# EAGLE board one_axis_JStep (EAGLE 6.3)
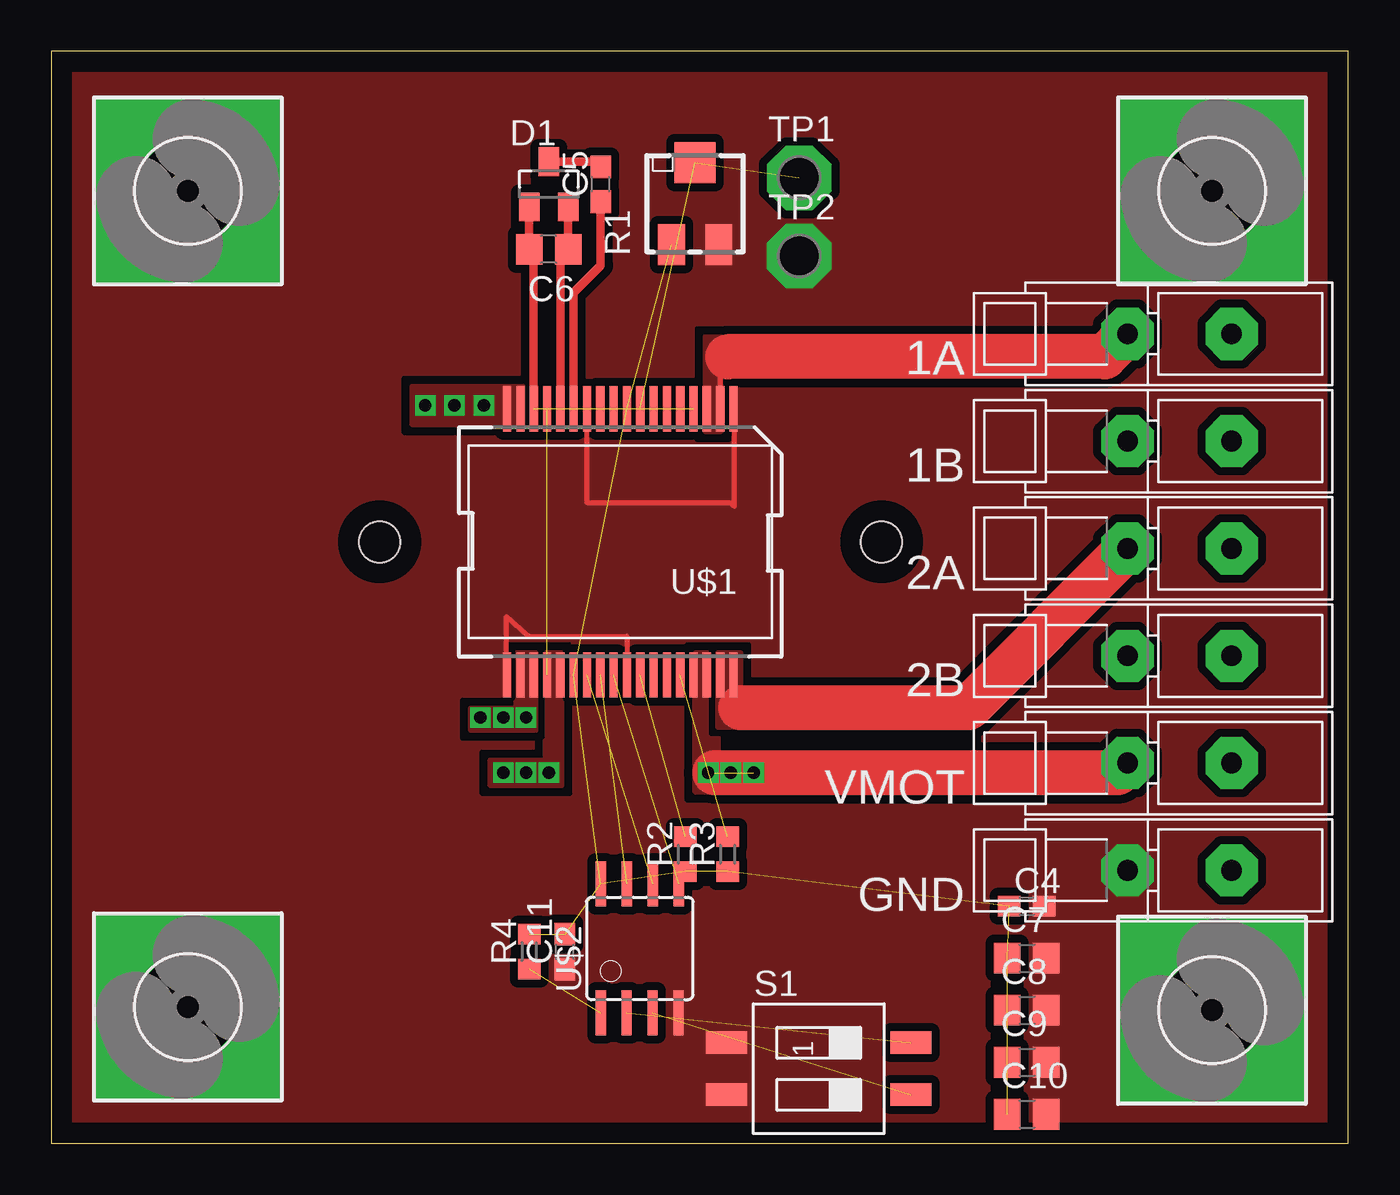
[diagram p0: board, top side]
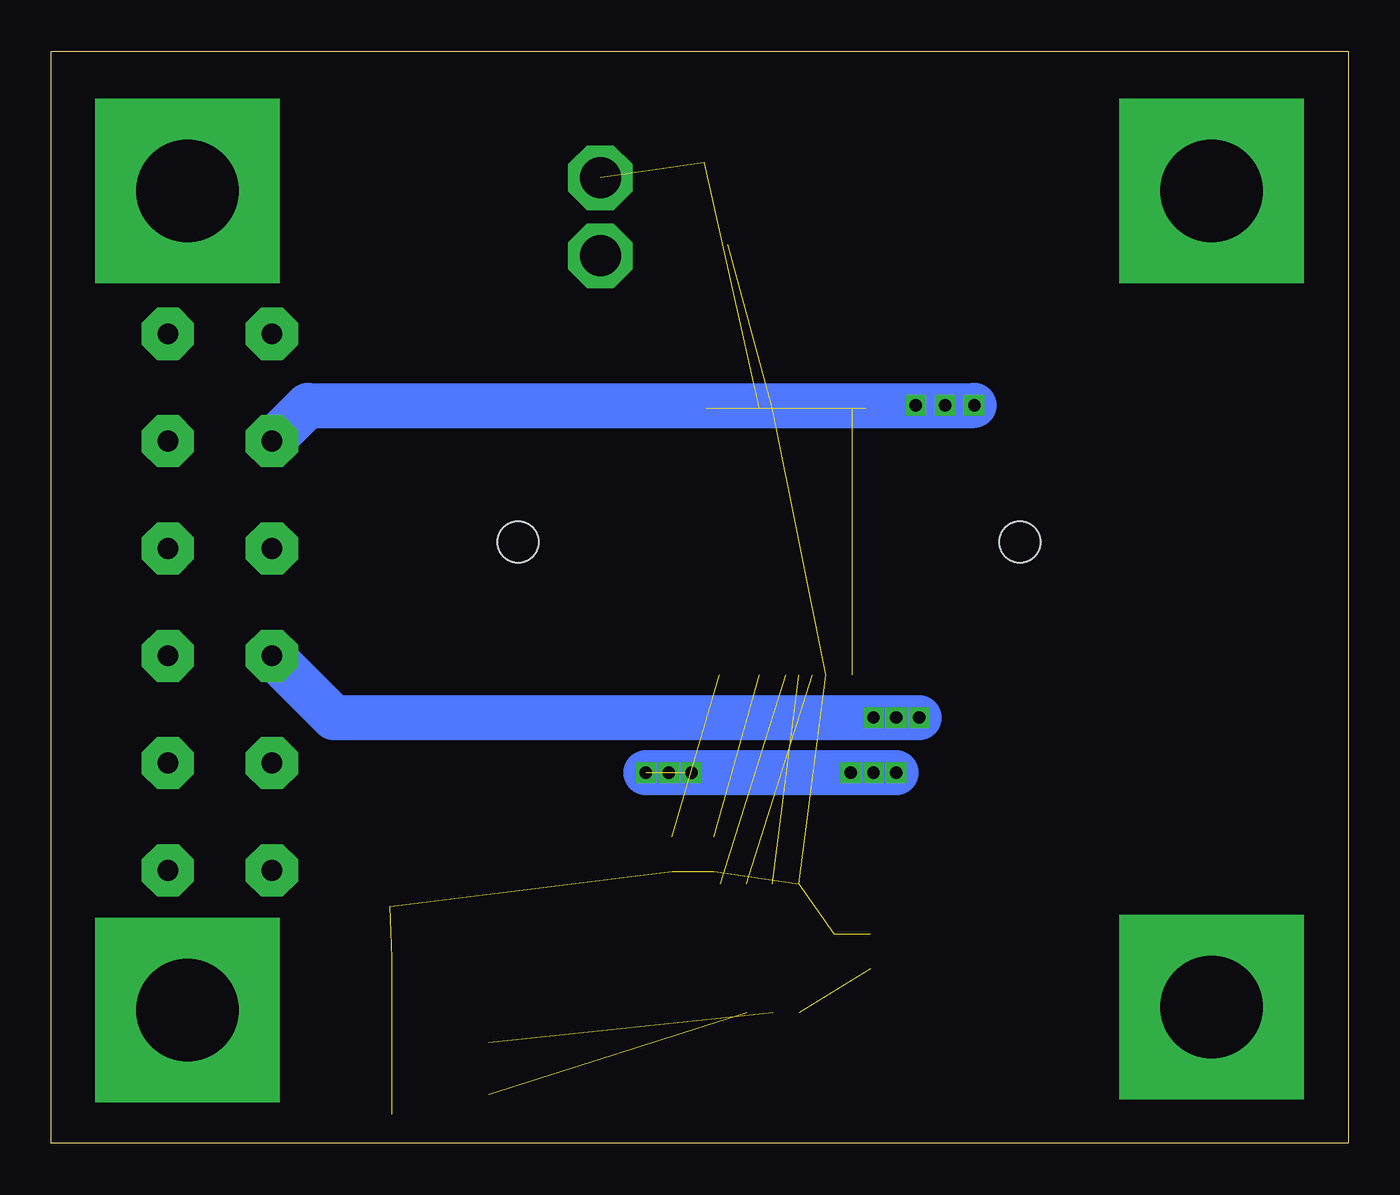
[diagram p1: board, bottom side, seen from below]

Size 63.32 x 53.33 mm. Coordinates in mm from the lower left corner, seen from the top.
Outline: 0,0 63.32,0 63.32,53.33 0,53.33 0,0
Copper layers (1*16): Top 0.035mm / dielectric 1.5mm / Bottom 0.035mm
Design rules "default *": minimum track width 10mil, minimum drill 24mil, track to track 8mil, track to pad 8mil, pad to pad 8mil, via to via 8mil, smd to smd 0mil, copper to edge 40mil, drill to drill 8mil, minimum pad ring 15mil, minimum via ring 8mil, stop-mask expansion 4mil, vias tented up to drill 0mil, thermal gap 10mil
Holes 2 mm at 16.03,29.37 40.53,29.37

## Footprints (pad centres in the part's own frame; a part is rotated, then mirrored left to right if it is on the bottom)
WAGO256 = drill 1.016 pad 2.54 octagon: 1 0,0; A1 -5.08,0
C0603 = smd 1.1 x 1: 1 -0.85,0; 2 0.85,0
C0805 = smd 1.3 x 1.5: 1 -0.95,0; 2 0.95,0
SOT23 = smd 1 x 1.4: 1 -0.95,-1.1; 2 0.95,-1.1; 3 0,1.1
5,0-PAD-SQUARE = drill 5 pad 9 square: B5 0,0
RTRIM5X = smd 1.3 x 2: 1 -1.15,-2; 3 1.15,-2 | smd 2 x 2: 2 0,2
R0603 = smd 1 x 1.1: 1 -0.85,0; 2 0.85,0
SMS-002 = smd 1.092 x 2.007: 1 -1.27,-4.496; 2 1.27,-4.496; 3 1.27,4.496; 4 -1.27,4.496
P1-20 = drill 2.007 pad 3.15 octagon: TP 0,0
POWERSO-36 = smd 0.4 x 2.2: 1 -5.525,-6.5; 2 -4.875,-6.5; 3 -4.225,-6.5; 4 -3.575,-6.5; 5 -2.925,-6.5; 6 -2.275,-6.5; 7 -1.625,-6.5; 8 -0.975,-6.5; 9 -0.325,-6.5; 10 0.325,-6.5; 11 0.975,-6.5; 12 1.625,-6.5; 13 2.275,-6.5; 14 2.925,-6.5; 15 3.575,-6.5; 16 4.225,-6.5; 17 4.875,-6.5; 18 5.525,-6.5; 19 5.525,6.5; 20 4.875,6.5; 21 4.225,6.5; 22 3.575,6.5; 23 2.925,6.5; 24 2.275,6.5; 25 1.625,6.5; 26 0.975,6.5; 27 0.325,6.5; 28 -0.325,6.5; 29 -0.975,6.5; 30 -1.625,6.5; 31 -2.275,6.5; 32 -2.925,6.5; 33 -3.575,6.5; 34 -4.225,6.5; 35 -4.875,6.5; 36 -5.525,6.5
SOIC8 = smd 0.5 x 2.2: 1 -1.905,-3.154; 2 -0.645,-3.154; 3 0.625,-3.154; 4 1.895,-3.154; 5 1.905,3.154; 6 0.635,3.154; 7 -0.635,3.154; 8 -1.905,3.154

## Placement (x,y rotation side)
1A  WAGO256  [WAGO256]  52.55,39.53 180 top
1B  WAGO256  [WAGO256]  52.55,34.29 180 top
2A  WAGO256  [WAGO256]  52.55,29.05 180 top
2B  WAGO256  [WAGO256]  52.55,23.81 180 top
C4  100n  [C0603]  47.62,11.59 0 top
C5  10n  [C0603]  26.83,46.83 90 top
C6  220n  [C0805]  24.29,43.66 180 top
C7  10u  [C0805]  47.62,9.05 0 top
C8  10u  [C0805]  47.62,6.51 0 top
C9  10u  [C0805]  47.62,3.97 0 top
C10  10u  [C0805]  47.62,1.43 0 top
C11  100n  [C0603]  25.08,9.37 90 top
D1  BAV99  [SOT23]  24.29,46.83 0 top
GND  WAGO256  [WAGO256]  52.55,13.34 180 top
H1  MOUNT-PAD-SQUARE5.0  [5,0-PAD-SQUARE]  6.67,6.67 0 top
H2  MOUNT-PAD-SQUARE5.0  [5,0-PAD-SQUARE]  6.67,46.51 0 top
H3  MOUNT-PAD-SQUARE5.0  [5,0-PAD-SQUARE]  56.67,46.51 0 top
H4  MOUNT-PAD-SQUARE5.0  [5,0-PAD-SQUARE]  56.67,6.51 0 top
R1  TS53YLK010  [RTRIM5X]  31.43,45.88 0 top
R2  39K  [R0603]  30.96,14.13 90 top
R3  39K  [R0603]  33.02,14.13 90 top
R4  10K  [R0603]  23.34,9.37 90 top
S1  SWS002  [SMS-002]  37.47,3.65 270 top
TP1  TPSPAD1-20  [P1-20]  36.51,47.15 0 top
TP2  TPSPAD1-20  [P1-20]  36.51,43.34 0 top
U$1  L6470  [POWERSO-36]  27.78,29.37 180 top
U$2  TINY25-20SU  [SOIC8]  28.73,9.53 0 top
VMOT  WAGO256  [WAGO256]  52.55,18.57 180 top

## Library data of the parts
1A 1B 2A 2B GND VMOT = #PaJa_konektory
C4-C11 R2-R4 = rcl
D1 = diode
H1-H4 = holes
R1 = resistor
S1 = smd-special
TP1 TP2 = testpad
U$1 = st-microelectronics
U$2 = avr-5

## Nets
CLK: U$1.26 U$2.7
CS: U$1.30
GND: C4.2 C7.2 C8.2 C9.2 C10.2 C11.1 GND.1 H1.B5 H2.B5 H3.B5 H4.B5 R1.3 S1.1 S1.2 TP2.TP U$1.1 U$1.12 U$1.19 U$1.28 U$2.4
MISO: U$1.25 U$2.6
MOSI: U$1.27 U$2.5
N$1: R1.2 TP1.TP U$1.8
N$3: R2.2 U$1.29
N$4: R3.2 U$1.32
N$8: C5.1 U$1.13
N$9: C5.2 D1.3
N$10: C6.1 D1.2 U$1.14
N$13: 1A.1 U$1.2 U$1.3
N$14: 1B.1 U$1.17 U$1.18
N$15: 2A.1 U$1.35 U$1.36
N$16: 2B.1 U$1.20 U$1.21
N$17: S1.4 U$2.2
N$18: S1.3 U$2.3
RESET: R4.1 U$2.1
VDD: C4.1 C7.1 C8.1 C9.1 C10.1 C11.2 R1.1 R2.1 R3.1 R4.2 U$1.9 U$1.24 U$2.8
VMOT: C6.2 D1.1 U$1.4 U$1.5 U$1.15 U$1.16 U$1.22 U$1.23 U$1.33 U$1.34 VMOT.1

## Tracks (layer width: path | path; a pad name or v marks a point on that pad's centre or on a via)
CLK  (1 unrouted)
GND
  Top 0.254: U$1.1 33.34,35.84 33.34,31.11 33.18,31.27 26.19,31.27 26.16,31.31 U$1.12 | U$1.19 22.22,23 22.22,25.72 23.34,24.76 28.1,24.76 28.11,24.76 U$1.28
  Top 0.406: U$1.28
  pour Top (isolate 0.406, rank 6, no thermals): 0,53.34 63.34,53.34 63.34,0 0,0
MISO  (1 unrouted)
MOSI  (1 unrouted)
N$1  (2 unrouted)
N$3  (1 unrouted)
N$4  (1 unrouted)
N$8
  Top 0.406: U$1.13 25.51,41.54 26.83,42.86 C5.1
N$9
  Top 0.406: D1.3 26.74,47.93 C5.2
N$10
  Top 0.406: U$1.14 24.86,43.27 C6.1 D1.2
N$13
  Top 0.254: 33.02,38.42 32.66,38.37 U$1.2
  Top 2.184: 33.02,38.42 51.43,38.42 1A.1
  pour Top (isolate 0.254, no thermals): 31.91,39.37 31.91,34.77 32.7,34.77 32.7,39.37
N$14  (via drill 0.6)
  Bottom 2.184: v18.26,36.04 50.8,36.04 1B.1
  other vias: 21.11,36.04 19.69,36.04
  pour Top (rank 3, no thermals): 17.62,36.99 23.02,36.99 23.02,35.08 17.62,35.08
N$15
  Top 2.184: 33.66,21.27 44.77,21.27 2A.1
  pour Top (no thermals): 32.54,23.97 33.66,23.97 33.66,20.32 32.54,20.32
N$16  (via drill 0.6)
  Bottom 2.184: v20.95,20.8 49.53,20.8 2B.1
  other vias: 23.18,20.8 22.07,20.8
  pour Top (rank 3, no thermals): 22.7,23.97 23.65,23.97 23.65,20.16 20.48,20.16 20.48,21.27 22.7,21.27
N$17  (1 unrouted)
N$18  (1 unrouted)
RESET  (1 unrouted)
VDD  (12 unrouted)
VMOT  (via drill 0.6)  (6 unrouted)
  Top 0.406: U$1.16 23.56,43.44 C6.2 D1.1
  Top 2.184: VMOT.1 52.07,18.1 32.39,18.1
  Bottom 2.184: v22.07,18.1 v34.29,18.1
  other vias: 24.29,18.1 23.18,18.1 32.07,18.1 33.18,18.1
  pour Top (isolate 0.33, rank 4, no thermals): 31.43,23.97 32.54,23.97 32.54,17.14 31.43,17.14
  pour Top (isolate 0.33, rank 4, no thermals): 24.13,23.97 24.92,23.97 24.92,17.46 21.43,17.46 21.43,18.73 24.13,18.73